# Altium PCB Time_skew.PcbDoc
Units mm, origin at the board's own origin, x right, y up, seen from the top; angles counter-clockwise.
Board outline 123.5 x 36 mm, 2 copper layers (Top Layer, Bottom Layer); 112 components, 61 nets, 346 pads, 107 vias.
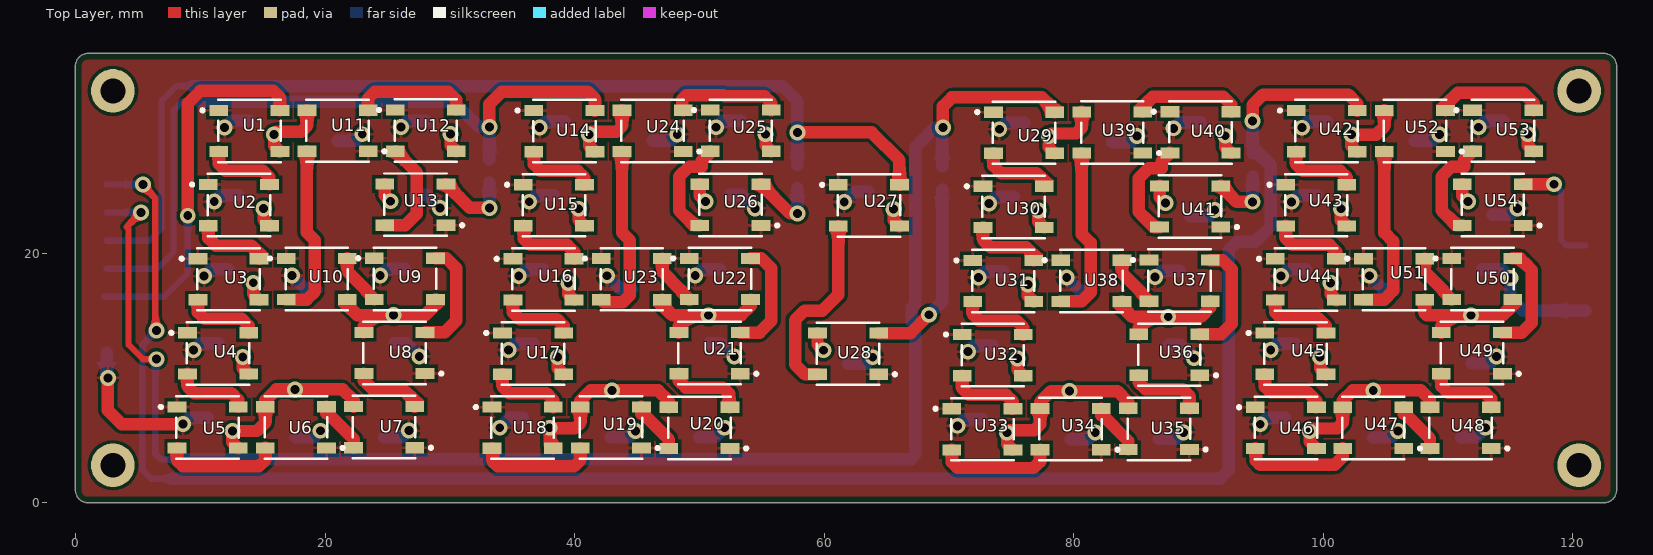
[diagram p0: Top Layer view]
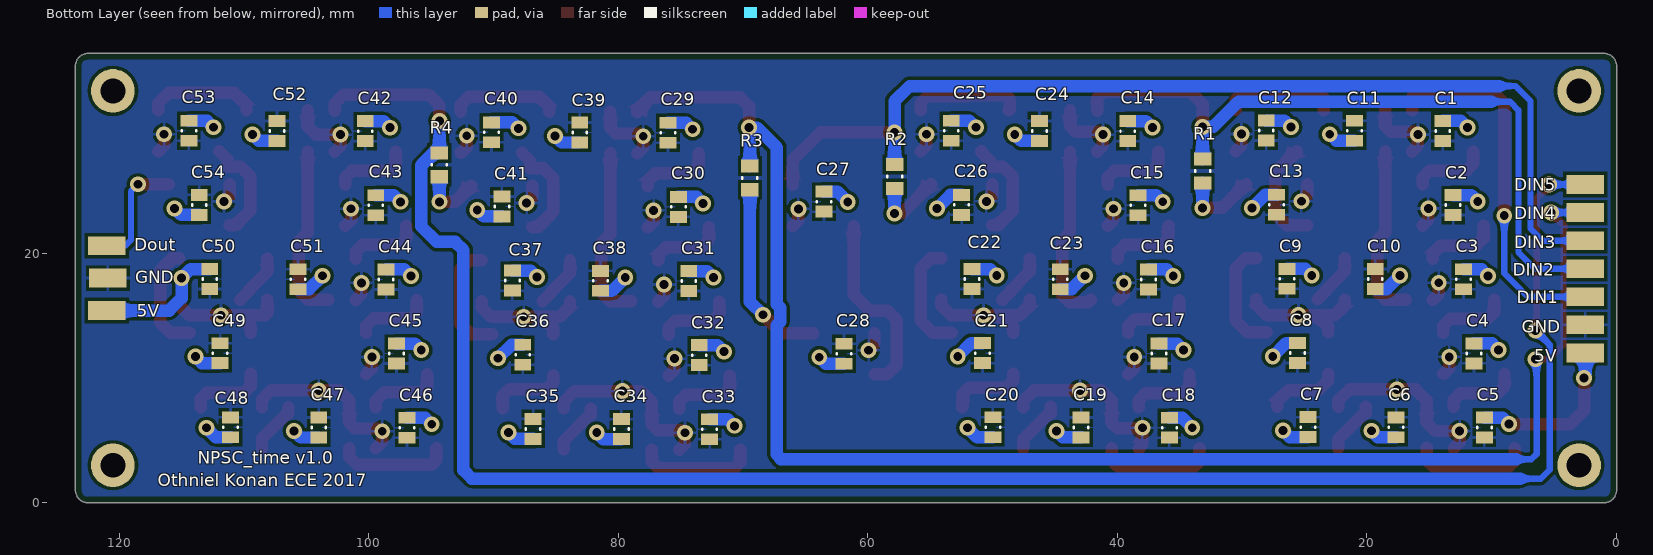
[diagram p1: Bottom Layer view, seen from below]
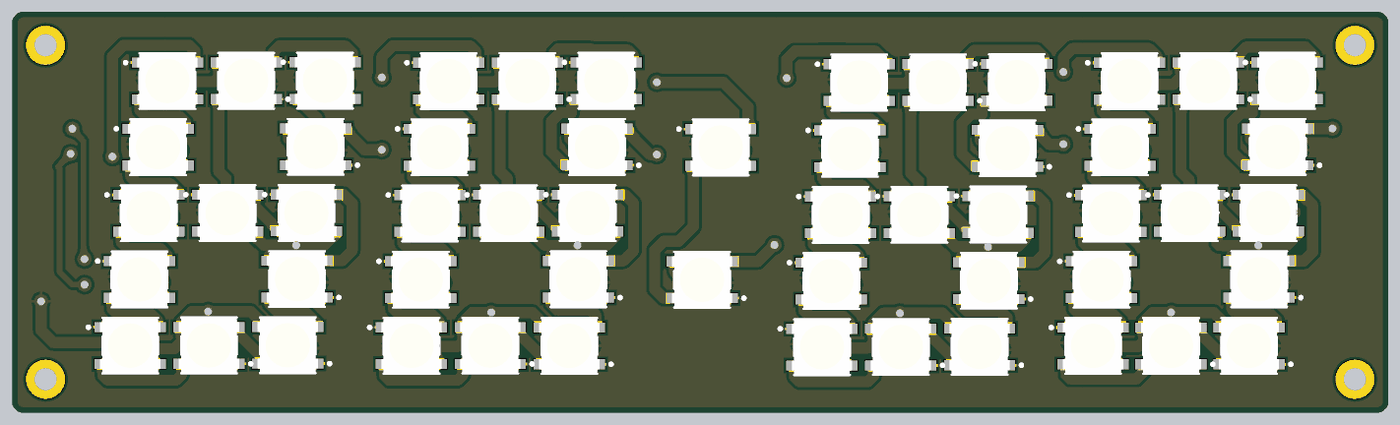
[diagram p2: 3D render of the assembled board from above, using the file's embedded part models]

## Layer stack, top to bottom
Top Solder: solder mask 0.0102, Solder Resist, Dk 3.5
Top Layer: signal copper 0.0356
Dielectric 1: dielectric 0.32, FR-4, Dk 4.8
Bottom Layer: signal copper 0.0356
Bottom Solder: solder mask 0.0102, Solder Resist, Dk 3.5

## Board outline
0,1 ccw(c1,1) 1,0 122.5,0 ccw(c122.5,1) 123.5,1 123.5,35 ccw(c122.5,35) 122.5,36 1,36 ccw(c1,35) 0,35

## Design rules (kind name [scope] priority, off if disabled: settings)
Clearance [All] p1: gap=0.254
PolygonConnect [All] p1: connectstyle=Relief reliefconductorwidth=0.254 reliefentries=4 polygonreliefangle="90 Angle" airgapwidth=0.254
RoomDefinition Time._skew [InComponentClass('Time._skew')] p1: confinementstyle=ConfineIn formatcopy=TRUE lockcomponents=FALSE outline -1,-4 129,-4 129,41 -1,41
RoutingVias [All] p1: holewidth=0.711 width=1.27 viastyle="Through Hole" minholewidth=0.711 minwidth=1.27 maxholewidth=0.711 maxwidth=1.27
SilkToSolderMaskClearance [IsPad] p1: minsilkscreentomaskgap=0.125 clearancetoexposedcopper=TRUE
SolderMaskExpansion [All] p1: expansion=0.102
Width [All] p1: maxlimit=2 minlimit=0.5 preferedwidth=1
29 further rules are at their usual default settings.

## Components (designator, comment, footprint, x,y, rotation, side; value= is the part's Value field where it differs from the comment)
C1 "CAP 0.5pF 10V 0805(2012)" CAPC0805(2012)100_L 13.933,29.789 r90 bottom
C2 "CAP 0.5pF 10V 0805(2012)" CAPC0805(2012)100_L 13.098,23.848 r90 bottom
C3 "CAP 0.5pF 10V 0805(2012)" CAPC0805(2012)100_L 12.263,17.906 r90 bottom
C4 "CAP 0.5pF 10V 0805(2012)" CAPC0805(2012)100_L 11.428,11.964 r90 bottom
C5 "CAP 0.5pF 10V 0805(2012)" CAPC0805(2012)100_L 10.593,6.023 r90 bottom
C6 "CAP 0.5pF 10V 0805(2012)" CAPC0805(2012)100_L 17.664,6.039 r270 bottom
C7 "CAP 0.5pF 10V 0805(2012)" CAPC0805(2012)100_L 24.735,6.055 r270 bottom
C8 "CAP 0.5pF 10V 0805(2012)" CAPC0805(2012)100_L 25.57,11.997 r90 bottom
C9 "CAP 0.5pF 10V 0805(2012)" CAPC0805(2012)100_L 26.405,17.938 r90 bottom
C10 "CAP 0.5pF 10V 0805(2012)" CAPC0805(2012)100_L 19.334,17.922 r270 bottom
C11 "CAP 0.5pF 10V 0805(2012)" CAPC0805(2012)100_L 21.004,29.805 r270 bottom
C12 "CAP 0.5pF 10V 0805(2012)" CAPC0805(2012)100_L 28.075,29.821 r90 bottom
C13 "CAP 0.5pF 10V 0805(2012)" CAPC0805(2012)100_L 27.24,23.88 r90 bottom
C14 "CAP 0.5pF 10V 0805(2012)" CAPC0805(2012)100_L 39.177,29.776 r90 bottom
C15 "CAP 0.5pF 10V 0805(2012)" CAPC0805(2012)100_L 38.342,23.834 r90 bottom
C16 "CAP 0.5pF 10V 0805(2012)" CAPC0805(2012)100_L 37.507,17.893 r90 bottom
C17 "CAP 0.5pF 10V 0805(2012)" CAPC0805(2012)100_L 36.672,11.951 r90 bottom
C18 "CAP 0.5pF 10V 0805(2012)" CAPC0805(2012)100_L 35.837,6.009 r90 bottom
C19 "CAP 0.5pF 10V 0805(2012)" CAPC0805(2012)100_L 42.908,6.026 r270 bottom
C20 "CAP 0.5pF 10V 0805(2012)" CAPC0805(2012)100_L 49.979,6.042 r270 bottom
C21 "CAP 0.5pF 10V 0805(2012)" CAPC0805(2012)100_L 50.814,11.983 r90 bottom
C22 "CAP 0.5pF 10V 0805(2012)" CAPC0805(2012)100_L 51.649,17.925 r90 bottom
C23 "CAP 0.5pF 10V 0805(2012)" CAPC0805(2012)100_L 44.578,17.909 r270 bottom
C24 "CAP 0.5pF 10V 0805(2012)" CAPC0805(2012)100_L 46.248,29.792 r270 bottom
C25 "CAP 0.5pF 10V 0805(2012)" CAPC0805(2012)100_L 53.319,29.808 r90 bottom
C26 "CAP 0.5pF 10V 0805(2012)" CAPC0805(2012)100_L 52.484,23.866 r90 bottom
C27 "CAP 0.5pF 10V 0805(2012)" CAPC0805(2012)100_L 63.516,24.126 r90 bottom
C28 "CAP 0.5pF 10V 0805(2012)" CAPC0805(2012)100_L 61.916,11.938 r270 bottom
C29 "CAP 0.5pF 10V 0805(2012)" CAPC0805(2012)100_L 76.018,29.647 r90 bottom
C30 "CAP 0.5pF 10V 0805(2012)" CAPC0805(2012)100_L 75.183,23.706 r90 bottom
C31 "CAP 0.5pF 10V 0805(2012)" CAPC0805(2012)100_L 74.348,17.764 r90 bottom
C32 "CAP 0.5pF 10V 0805(2012)" CAPC0805(2012)100_L 73.513,11.823 r90 bottom
C33 "CAP 0.5pF 10V 0805(2012)" CAPC0805(2012)100_L 72.678,5.881 r90 bottom
C34 "CAP 0.5pF 10V 0805(2012)" CAPC0805(2012)100_L 79.749,5.897 r270 bottom
C35 "CAP 0.5pF 10V 0805(2012)" CAPC0805(2012)100_L 86.82,5.913 r270 bottom
C36 "CAP 0.5pF 10V 0805(2012)" CAPC0805(2012)100_L 87.655,11.855 r90 bottom
C37 "CAP 0.5pF 10V 0805(2012)" CAPC0805(2012)100_L 88.49,17.796 r90 bottom
C38 "CAP 0.5pF 10V 0805(2012)" CAPC0805(2012)100_L 81.419,17.78 r270 bottom
C39 "CAP 0.5pF 10V 0805(2012)" CAPC0805(2012)100_L 83.089,29.663 r270 bottom
C40 "CAP 0.5pF 10V 0805(2012)" CAPC0805(2012)100_L 90.16,29.68 r90 bottom
C41 "CAP 0.5pF 10V 0805(2012)" CAPC0805(2012)100_L 89.325,23.738 r270 bottom
C42 "CAP 0.5pF 10V 0805(2012)" CAPC0805(2012)100_L 100.271,29.773 r90 bottom
C43 "CAP 0.5pF 10V 0805(2012)" CAPC0805(2012)100_L 99.436,23.832 r90 bottom
C44 "CAP 0.5pF 10V 0805(2012)" CAPC0805(2012)100_L 98.601,17.89 r90 bottom
C45 "CAP 0.5pF 10V 0805(2012)" CAPC0805(2012)100_L 97.766,11.948 r90 bottom
C46 "CAP 0.5pF 10V 0805(2012)" CAPC0805(2012)100_L 96.931,6.007 r90 bottom
C47 "CAP 0.5pF 10V 0805(2012)" CAPC0805(2012)100_L 104.002,6.023 r270 bottom
C48 "CAP 0.5pF 10V 0805(2012)" CAPC0805(2012)100_L 111.073,6.039 r270 bottom
C49 "CAP 0.5pF 10V 0805(2012)" CAPC0805(2012)100_L 111.908,11.981 r270 bottom
C50 "CAP 0.5pF 10V 0805(2012)" CAPC0805(2012)100_L 112.743,17.922 r90 bottom
C51 "CAP 0.5pF 10V 0805(2012)" CAPC0805(2012)100_L 105.672,17.906 r270 bottom
C52 "CAP 0.5pF 10V 0805(2012)" CAPC0805(2012)100_L 107.342,29.789 r270 bottom
C53 "CAP 0.5pF 10V 0805(2012)" CAPC0805(2012)100_L 114.413,29.805 r90 bottom
C54 "CAP 0.5pF 10V 0805(2012)" CAPC0805(2012)100_L 113.578,23.864 r270 bottom
R1 "Jumper 0805(2012)" RESC0805(2012)_N 33.174,26.58 r90 bottom
R2 "Jumper 0805(2012)" RESC0805(2012)_N 57.853,26.141 r90 bottom
R3 "Jumper 0805(2012)" RESC0805(2012)_N 69.45,26.026 r270 bottom
R4 "Jumper 0805(2012)" RESC0805(2012)_N 94.338,27.073 r270 bottom
U1 "WS2812B" ADAI-WS2812B_V 13.933,29.789 r0 top
U2 "WS2812B" ADAI-WS2812B_V 13.098,23.848 r0 top
U3 "WS2812B" ADAI-WS2812B_V 12.263,17.906 r0 top
U4 "WS2812B" ADAI-WS2812B_V 11.428,11.964 r0 top
U5 "WS2812B" ADAI-WS2812B_V 10.593,6.023 r0 top
U6 "WS2812B" ADAI-WS2812B_V 17.664,6.039 r180 top
U7 "WS2812B" ADAI-WS2812B_V 24.735,6.055 r180 top
U8 "WS2812B" ADAI-WS2812B_V 25.57,11.997 r180 top
U9 "WS2812B" ADAI-WS2812B_V 26.405,17.938 r0 top
U10 "WS2812B" ADAI-WS2812B_V 19.334,17.922 r0 top
U11 "WS2812B" ADAI-WS2812B_V 21.004,29.805 r180 top
U12 "WS2812B" ADAI-WS2812B_V 28.075,29.821 r0 top
U13 "WS2812B" ADAI-WS2812B_V 27.24,23.88 r180 top
U14 "WS2812B" ADAI-WS2812B_V 39.177,29.776 r0 top
U15 "WS2812B" ADAI-WS2812B_V 38.342,23.834 r0 top
U16 "WS2812B" ADAI-WS2812B_V 37.507,17.893 r0 top
U17 "WS2812B" ADAI-WS2812B_V 36.672,11.951 r0 top
U18 "WS2812B" ADAI-WS2812B_V 35.837,6.009 r0 top
U19 "WS2812B" ADAI-WS2812B_V 42.908,6.026 r180 top
U20 "WS2812B" ADAI-WS2812B_V 50,6 r180 top
U21 "WS2812B" ADAI-WS2812B_V 50.814,11.983 r180 top
U22 "WS2812B" ADAI-WS2812B_V 51.649,17.925 r0 top
U23 "WS2812B" ADAI-WS2812B_V 44.578,17.909 r0 top
U24 "WS2812B" ADAI-WS2812B_V 46.248,29.792 r180 top
U25 "WS2812B" ADAI-WS2812B_V 53.319,29.808 r0 top
U26 "WS2812B" ADAI-WS2812B_V 52.484,23.866 r180 top
U27 "WS2812B" ADAI-WS2812B_V 63.586,23.821 r0 top
U28 "WS2812B" ADAI-WS2812B_V 61.916,11.938 r180 top
U29 "WS2812B" ADAI-WS2812B_V 76.018,29.647 r0 top
U30 "WS2812B" ADAI-WS2812B_V 75.183,23.706 r0 top
U31 "WS2812B" ADAI-WS2812B_V 74.348,17.764 r0 top
U32 "WS2812B" ADAI-WS2812B_V 73.513,11.823 r0 top
U33 "WS2812B" ADAI-WS2812B_V 72.678,5.881 r0 top
U34 "WS2812B" ADAI-WS2812B_V 79.749,5.897 r180 top
U35 "WS2812B" ADAI-WS2812B_V 86.82,5.913 r180 top
U36 "WS2812B" ADAI-WS2812B_V 87.655,11.855 r180 top
U37 "WS2812B" ADAI-WS2812B_V 88.49,17.796 r0 top
U38 "WS2812B" ADAI-WS2812B_V 81.419,17.78 r0 top
U39 "WS2812B" ADAI-WS2812B_V 83.089,29.663 r180 top
U40 "WS2812B" ADAI-WS2812B_V 90.16,29.68 r0 top
U41 "WS2812B" ADAI-WS2812B_V 89.325,23.738 r180 top
U42 "WS2812B" ADAI-WS2812B_V 100.271,29.773 r0 top
U43 "WS2812B" ADAI-WS2812B_V 99.436,23.832 r0 top
U44 "WS2812B" ADAI-WS2812B_V 98.601,17.89 r0 top
U45 "WS2812B" ADAI-WS2812B_V 97.766,11.948 r0 top
U46 "WS2812B" ADAI-WS2812B_V 97,6 r0 top
U47 "WS2812B" ADAI-WS2812B_V 104,6 r180 top
U48 "WS2812B" ADAI-WS2812B_V 111,6 r180 top
U49 "WS2812B" ADAI-WS2812B_V 111.908,11.981 r180 top
U50 "WS2812B" ADAI-WS2812B_V 112.743,17.922 r0 top
U51 "WS2812B" ADAI-WS2812B_V 105.672,17.906 r0 top
U52 "WS2812B" ADAI-WS2812B_V 107.342,29.789 r180 top
U53 "WS2812B" ADAI-WS2812B_V 114.413,29.805 r0 top
U54 "WS2812B" ADAI-WS2812B_V 113.578,23.864 r180 top

## Footprints (in the part's own frame and the unit in brackets; to place one, negate y for a bottom-side part, rotate by r counter-clockwise, add the part's x,y. Pads: shape width x height; smd on the part's side, far side on the other; paste and mask are expansions set on the pad)
ADAI-WS2812B_V [mm] "SMD, 4-Leads, Body 5x5mm, Pitch 3.3mm"
  rect 1.5x0.9 smd: 1(-2.45,1.65) 2(-2.45,-1.65) 3(2.45,-1.65) 4(2.45,1.65)
  silkscreen extent -3.87,-2.5 2.5,2.5, body extent -2.7,-2.5 2.7,2.5, height 1.69
CAPC0805(2012)100_L [mm] "Chip Capacitor, Body 2.0x1.2mm, Height 1.0mm, IPC High Density"
  rect 0.95x1.35 smd: 1(-0.8,0) 2(0.8,0)
  silkscreen extent -0.05,-0.58 0.05,0.58, body extent -1.1,-0.72 1.1,0.72, height 1
RESC0805(2012)_N [mm] "Chip Resistor, Body 2.0x1.3mm, IPC Medium Density"
  rect 1.05x1.4 smd: 1(-0.95,0) 2(0.95,0)
  silkscreen extent -0.05,-0.6 0.05,0.6, body extent -1.1,-0.67 1.1,0.68, height 0.7

## Part data
C1 C2 C3 C4 C5 C6 C7 C8 C9 C10 C11 C12 C13 C14 C15 C16 C17 C18 C19 C20 C21 C22 C23 C24 C25 C26 C27 C28 C29 C30 C31 C32 C33 C34 C35 C36 C37 C38 C39 C40 C41 C42 C43 C44 C45 C46 C47 C48 C49 C50 C51 C52 C53 C54: library part CMP-1036-00005-1, "CAP 0.5pF 10V ±0.5pF 0805 (2012 Metric) Thickness 1mm SMD"
R1 R2 R3 R4: library part CMP-1013-00001-1, "Jumper 0805 (2012 Metric)"
U1 U2 U3 U4 U5 U6 U7 U8 U9 U10 U11 U12 U13 U14 U15 U16 U17 U18 U19 U20 U21 U22 U23 U24 U25 U26 U27 U28 U29 U30 U31 U32 U33 U34 U35 U36 U37 U38 U39 U40 U41 U42 U43 U44 U45 U46 U47 U48 U49 U50 U51 U52 U53 U54: library part CMP-1740-00005-1, "Intelligent Control LED Integrated Light Source, 3.5 to 5.3 V, -25 to 80 degC, 4-Pin SMD, RoHS, Bulk"

## Free pads (board coordinates)
  rect 3x1.5 smd far side: 1(2.5,12) 1(120.9,18) 1(121,15.4) 2(2.5,14.25) 3(2.5,16.5) 3(121,20.6) 4(2.5,18.75) 5(2.5,21) 6(2.5,23.25) 7(2.5,25.5)
  round 3.5 hole 2: 2(3,3) 3(3,33) 4(120.5,3) 5(120.5,33)

## Via types
v1: diameter 1.27, hole 0.711, Top Layer to Bottom Layer, tented both sides, 107 vias

## Nets (pads, with @x,y where several pads share a name; then routed paths per layer and width w, separated by ;. In a path a pad name is that pad's centre, name@x,y a point inside that pad or via, vN(x,y) a via of type N, cw(c..) or ccw(c..) an arc to the next point about the centre after c; other vN are vias at no path point)
5V: C1.2 C2.2 C3.2 C4.2 C5.2 C6.2 C7.2 C8.2 C9.2 C10.2 C11.2 C12.2 C13.2 C14.2 C15.2 C16.2 C17.2 C18.2 C19.2 C20.2 C21.2 C22.2 C23.2 C24.2 C25.2 C26.2 C27.2 C28.2 C29.2 C30.2 C31.2 C32.2 C33.2 C34.2 C35.2 C36.2 C37.2 C38.2 C39.2 C40.2 C41.2 C42.2 C43.2 C44.2 C45.2 C46.2 C47.2 C48.2 C49.2 C50.2 C51.2 C52.2 C53.2 C54.2 pad.1@2.5,12 pad.1@121,15.4 U1.1 U2.1 U3.1 U4.1 U5.1 U6.1 U7.1 U8.1 U9.1 U10.1 U11.1 U12.1 U13.1 U14.1 U15.1 U16.1 U17.1 U18.1 U19.1 U20.1 U21.1 U22.1 U23.1 U24.1 U25.1 U26.1 U27.1 U28.1 U29.1 U30.1 U31.1 U32.1 U33.1 U34.1 U35.1 U36.1 U37.1 U38.1 U39.1 U40.1 U41.1 U42.1 U43.1 U44.1 U45.1 U46.1 U47.1 U48.1 U49.1 U50.1 U51.1 U52.1 U53.1 U54.1 | length 140.6
  Top Layer w1: v1(2.6,10) 2.6,7.4 3.699,6.301 v1(8.613,6.301)
  Bottom Layer w1: pad.1@2.5,12 2.5,10.1 v1(2.6,10) ; v1(8.613,6.301) 9.134,6.823 C5.2 ; v1(9.448,12.243) 9.969,12.764 C4.2 ; v1(10.314,18.153) 10.314,18.216 10.804,18.706 C3.2 ; v1(11.118,24.126) 11.639,24.648 C2.2 ; v1(11.953,30.068) 12.474,30.589 C1.2 ; v1(17.354,18.2) 18.432,17.122 C10.2 ; C6.2 19.123,5.239 v1(19.645,5.761) ; C11.2 22.463,29.005 v1(22.985,29.527) ; v1(24.425,18.217) 24.946,18.738 C9.2 ; C7.2 26.194,5.255 v1(26.716,5.777) ; C8.2 26.473,12.797 v1(27.551,11.718) ; v1(26.095,30.1) 26.617,30.621 C12.2 ; C13.2 28.143,24.68 v1(29.221,23.601) ; v1(34,6) 34.809,6.809 C18.2 ; v1(34.692,12.229) 35.213,12.751 C17.2 ; v1(35.527,18.171) 36.048,18.693 C16.2 ; v1(36.362,24.113) 36.883,24.634 C15.2 ; v1(37.197,30.054) 37.718,30.576 C14.2 ; v1(42.598,18.187) 43.676,17.109 C23.2 ; C19.2 44.367,5.226 v1(44.889,5.747) ; C24.2 47.707,28.992 v1(48.229,29.514) ; v1(49.669,18.203) 50.19,18.725 C22.2 ; C20.2 51.242,5.242 v1(52,6) ; C21.2 51.716,12.783 v1(52.795,11.705) ; v1(51.339,30.086) 51.86,30.608 C25.2 ; C26.2 53.386,24.666 v1(54.465,23.588) ; v1(61.605,24.099) 62.432,24.926 C27.2 ; C28.2 63.375,11.138 v1(63.896,11.659) ; v1(70.697,6.159) 71.219,6.681 C33.2 ; v1(71.532,12.101) 72.054,12.623 C32.2 ; v1(72.367,18.043) 72.889,18.564 C31.2 ; v1(73.202,23.984) 73.724,24.506 C30.2 ; v1(74.037,29.926) 74.559,30.447 C29.2 ; v1(79.438,18.059) 80.517,16.98 C38.2 ; C34.2 81.208,5.097 v1(81.729,5.619) ; C39.2 84.548,28.863 v1(85.069,29.385) ; v1(86.509,18.075) 87.031,18.596 C37.2 ; C35.2 88.279,5.113 v1(88.8,5.635) ; C36.2 88.557,12.655 v1(89.635,11.576) ; v1(88,30) 88.48,30.48 C40.2 ; C41.2 90.784,22.938 v1(91.305,23.46) ; v1(94.951,6.285) 95.472,6.807 C46.2 ; v1(95.786,12.227) 96.307,12.748 C45.2 ; v1(96.621,18.168) 97.142,18.69 C44.2 ; v1(97.456,24.11) 97.977,24.632 C43.2 ; v1(98.291,30.052) 98.812,30.573 C42.2 ; v1(103.692,18.184) 104.77,17.106 C51.2 ; C47.2 105.461,5.223 v1(105.983,5.744) ; C52.2 108.801,28.989 v1(109.323,29.511) ; C48.2 112.239,5.239 v1(113,6) ; C49.2 113.367,11.181 v1(113.889,11.702) ; v1(112.433,30.084) 112.955,30.605 C53.2 ; C50.2 114.278,18.722 v1(115,18) 115,16.4 116,15.4 pad.1@121,15.4 ; C54.2 115.037,23.064 v1(115.559,23.585)
Din1: pad.3@2.5,16.5 U1.4 | length 30.1
  Top Layer w1: v1(9,23) 9,32 10,33 15.859,33 16.383,32.476 U1.4
  Bottom Layer w0.5: pad.3@2.3,16.5 7.1,16.5 9,18.4 v1(9,23)
Din2: pad.4@2.5,18.75 R1.2 U14.4 | length 58.2
  Top Layer w1: v1(33.174,30.108) 33.174,31.941 34.18,32.947 41.064,32.947 41.627,32.384 U14.4
  Bottom Layer w0.5: pad.4@2.5,18.75 6.55,18.75 7.861,20.061 7.861,31.461 8.534,32.134 10.034,32.134
  Bottom Layer w1: 10.034,32.134 30.289,32.134 30.404,32.019 30.412,32.019 32.323,30.108 v1(33.174,30.108) R1.2
Din3: pad.5@2.5,21 R2.2 U27.4 | length 83.1
  Top Layer w1: v1(57.853,29.669) 63.811,29.669 66.036,27.444 U27.4
  Bottom Layer w0.5: pad.5@2.5,21 5.9,21 6.9,22 6.9,32.2 8.088,33.388 9.388,33.388
  Bottom Layer w1: 9.388,33.388 56.642,33.388 57.853,32.177 v1(57.853,29.669) R2.2
Din4: pad.6 R3.1 U29.4 | length 127.7
  Top Layer w0.5: v1(5.25,23.25) 4.1,22.1 4.261,21.939 4.261,12.661 5.422,11.5 v1(6.5,11.5)
  Top Layer w1: v1(69.511,30.057) 69.511,31.759 70.231,32.479 72.483,32.479 72.505,32.501 74.63,32.501 74.652,32.479 77.426,32.479 78.468,31.437 U29.4
  Bottom Layer w0.5: pad.6 v1(5.25,23.25) ; v1@6.4,11.4 6.4,3.9 6.828,3.472 8.053,3.472
  Bottom Layer w1: 8.053,3.472 66.971,3.472 67.29,3.883 67.29,14.224 67.025,14.488 67.025,15.639 67.29,15.904 67.29,28.457 68.89,30.057 v1(69.511,30.057) 69.45,29.995 R3.1
Din5: pad.7 R4.1 U42.4 | length 156.3
  Top Layer w0.5: v1(5.4,25.5) 5.4,25.4 6.4,24.4 6.4,13.896 v1(6.496,13.8)
  Top Layer w1: v1(94.338,30.6) 94.338,31.869 95.173,32.704 102.006,32.704 102.721,31.988 U42.4
  Bottom Layer w0.5: pad.7 v1(5.4,25.5) ; v1(6.496,13.8) 5.4,12.704 5.361,12.665 5.361,2.639 6.083,1.917 7.717,1.917
  Bottom Layer w1: 7.717,1.917 91.728,1.917 92.413,2.602 92.413,20.24 93.077,20.904 94.544,20.904 95.792,22.152 95.792,27.035 94.804,28.023 R4.1 v1(94.338,30.6)
Dout: pad.3@121,20.6 U54.2 | length 9.3
  Top Layer w1: U54.2 v1(118.486,25.514)
  Bottom Layer w0.5: v1(118.486,25.514) 119.058,24.942 119.058,21.042 119.5,20.6 pad.3@121,20.6
GND: C1.1 C2.1 C3.1 C4.1 C5.1 C6.1 C7.1 C8.1 C9.1 C10.1 C11.1 C12.1 C13.1 C14.1 C15.1 C16.1 C17.1 C18.1 C19.1 C20.1 C21.1 C22.1 C23.1 C24.1 C25.1 C26.1 C27.1 C28.1 C29.1 C30.1 C31.1 C32.1 C33.1 C34.1 C35.1 C36.1 C37.1 C38.1 C39.1 C40.1 C41.1 C42.1 C43.1 C44.1 C45.1 C46.1 C47.1 C48.1 C49.1 C50.1 C51.1 C52.1 C53.1 C54.1 pad.1@120.9,18 pad.2@2.5,14.25 U1.3 U2.3 U3.3 U4.3 U5.3 U6.3 U7.3 U8.3 U9.3 U10.3 U11.3 U12.3 U13.3 U14.3 U15.3 U16.3 U17.3 U18.3 U19.3 U20.3 U21.3 U22.3 U23.3 U24.3 U25.3 U26.3 U27.3 U28.3 U29.3 U30.3 U31.3 U32.3 U33.3 U34.3 U35.3 U36.3 U37.3 U38.3 U39.3 U40.3 U41.3 U42.3 U43.3 U44.3 U45.3 U46.3 U47.3 U48.3 U49.3 U50.3 U51.3 U52.3 U53.3 U54.3 | length 157.6
  Top Layer w1: U5.3 12.574,4.842 v1(12.574,5.745) 14.546,5.745 15.214,6.413 U6.3 15.214,8.195 16.099,9.079 v1(17.587,9.079) 21.417,9.079 22.285,8.211 U7.3 ; v1(13.409,11.686) 13.409,10.784 U4.3 ; v1(14.244,17.628) 14.244,16.726 U3.3 ; v1(15.079,23.569) 15.079,22.667 U2.3 ; U1.3 15.914,28.609 v1(15.914,29.511) 16.131,29.728 18.103,29.728 18.554,30.179 U11.3 ; U10.3 21.784,15.846 22.594,15.037 24.005,15.037 ; U8.3 23.12,14.152 24.005,15.037 ; U13.3 24.79,24.628 v1(25.26,24.158) ; U9.3 28.855,15.862 28.03,15.037 v1(25.493,15.037) 24.005,15.037 ; v1(30.056,29.543) 30.056,28.641 U12.3 ; U18.3 38,4.646 v1(38,6) 38.052,5.948 40.007,5.948 40.458,6.399 U19.3 40.458,8.181 41.277,9 v1(43,9) 46.688,9 47.55,8.138 U20.3 ; v1(38.653,11.673) 38.653,10.771 U17.3 ; v1(39.488,17.614) 39.488,16.712 U16.3 ; v1(40.323,23.556) 40.323,22.654 U15.3 ; U14.3 41.158,28.595 v1(41.158,29.498) 41.374,29.714 43.347,29.714 43.798,30.166 U24.3 ; U23.3 47.028,15.833 47.837,15.024 49.249,15.024 ; U21.3 48.364,14.139 49.249,15.024 ; U26.3 50.034,24.614 v1(50.504,24.145) ; U22.3 54.099,15.769 53.354,15.024 v1(50.737,15.024) 49.249,15.024 ; v1(55.3,29.53) 55.3,28.627 U25.3 ; U28.3 59.466,12.686 v1(59.935,12.216) ; v1(65.566,23.543) 65.566,22.64 U27.3 ; U33.3 74.658,4.7 v1(74.658,5.603) 74.875,5.819 76.847,5.819 77.299,6.271 U34.3 77.299,8.053 78.183,8.937 v1(79.671,8.937) 83.501,8.937 84.37,8.069 U35.3 ; v1(75.493,11.544) 75.493,10.642 U32.3 ; v1(76.328,17.486) 76.328,16.584 U31.3 ; v1(77.163,23.427) 77.163,22.525 U30.3 ; U29.3 77.998,28.467 v1(77.998,29.369) 78.215,29.586 80.188,29.586 80.639,30.037 U39.3 ; U38.3 83.869,15.704 84.678,14.895 86.09,14.895 ; U36.3 85.205,14.01 86.09,14.895 ; U41.3 86.875,24.486 v1(87.344,24.016) ; U37.3 90.94,15.641 90.194,14.895 v1(87.577,14.895) 86.09,14.895 ; v1(92.14,29.401) 92.14,28.499 U40.3 ; U46.3 98.912,4.888 v1(98.912,5.728) 99.129,5.945 101.101,5.945 101.55,6.394 U47.3 101.55,8.181 102.369,9 v1(104,9) 107.818,9 108.55,8.268 U48.3 ; v1(99.747,11.67) 99.747,10.768 U45.3 ; v1(100.582,17.612) 100.582,16.709 U44.3 ; v1(101.417,23.553) 101.417,22.651 U43.3 ; U42.3 102.252,28.593 v1(102.252,29.495) 104.224,29.495 104.892,30.163 U52.3 ; U51.3 108.122,15.186 108.287,15.021 110.343,15.021 ; U49.3 109.458,14.136 110.343,15.021 ; U54.3 111.128,24.612 v1(111.598,24.142) ; U50.3 115.193,15.846 114.368,15.021 v1(111.831,15.021) 110.343,15.021 ; v1(116.394,29.527) 116.394,28.625 U53.3
NetR1_1: R1.1 U13.2 | length 6.3
  Top Layer w1: U13.2 31.603,23.618 v1(33.174,23.618)
  Bottom Layer w1: v1(33.174,23.618) R1.1
NetR2_1: R2.1 U26.2 | length 5.9
  Top Layer w1: U26.2@54.951,25.516 U26.2 57.272,23.179 v1(57.853,23.179)
  Bottom Layer w1: v1(57.853,23.179) R2.1
NetR3_2: R3.2 U28.2 | length 15.1
  Top Layer w1: U28.2 66.938,13.588 v1(68.414,15.064)
  Bottom Layer w1: v1(68.414,15.064) 69.45,16.1 R3.2
NetR4_2: R4.2 U41.2 | length 5.1
  Top Layer w1: U41.2 93.053,24.11 v1(94.338,24.11)
  Bottom Layer w1: v1(94.338,24.11) R4.2
NetU1_2: U1.2 U2.4 | length 6.1
  Top Layer w1: U1.2 11.483,27.149 12.022,26.61 15.001,26.61 15.548,26.063 U2.4
NetU2_2: U2.2 U3.4 | length 6
  Top Layer w1: U2.2 10.648,21.207 11.257,20.599 14.097,20.599 14.713,19.982 U3.4
NetU3_2: U3.2 U4.4 | length 6.1
  Top Layer w1: U3.2 9.813,15.266 10.352,14.727 13.331,14.727 13.878,14.179 U4.4
NetU4_2: U4.2 U5.4 | length 6.1
  Top Layer w1: U4.2 8.978,9.324 9.517,8.785 12.496,8.785 13.043,8.238 U5.4
NetU5_2: U5.2 U6.4 | length 9.4
  Top Layer w1: U5.2 8.143,3.382 8.605,2.921 14.701,2.921 15.214,3.434 U6.4
NetU6_2: U6.2 U7.4 | length 4.2
  Top Layer w1: U6.2 20.114,7.15 20.22,7.15 22.285,5.084 U7.4
NetU7_2: U7.2 U8.4 | length 5.7
  Top Layer w1: U8.4 23.12,9.782 23.876,9.026 26.29,9.026 27.185,8.131 U7.2
NetU8_2: U8.2 U9.4 | length 9.1
  Top Layer w1: U8.2 29.584,13.647 30.514,14.577 30.514,18.805 29.731,19.588 U9.4
NetU9_2: U9.2 U10.4 | length 4.2
  Top Layer w1: U10.4 21.784,18.538 23.288,17.034 23.288,16.955 23.953,16.291 U9.2@23.955,16.291
NetU10_2: U10.2 U11.4 | length 14.1
  Top Layer w1: U10.2 18.535,16.272 19.195,16.932 19.195,21.024 18.554,21.665 U11.4
NetU11_2: U11.2 U12.4 | length 9.3
  Top Layer w1: U11.2 23.454,32.411 23.967,32.923 29.893,32.923 30.525,32.291 U12.4
NetU12_2: U12.2 U13.4 | length 8.7
  Top Layer w1: U13.4 26.414,22.23 27.355,23.171 27.355,26.442 U12.2
NetU14_2: U14.2 U15.4 | length 6.1
  Top Layer w1: U14.2 36.727,27.135 37.266,26.596 40.245,26.596 40.792,26.049 U15.4
NetU15_2: U15.2 U16.4 | length 6.1
  Top Layer w1: U15.2 35.944,22.132 35.944,21.142 36.431,20.655 39.41,20.655 39.957,20.108 U16.4
NetU16_2: U16.2 U17.4 | length 6.1
  Top Layer w1: U16.2 35.057,15.252 35.596,14.713 38.575,14.713 39.122,14.166 U17.4
NetU17_2: U17.2 U18.4 | length 6.1
  Top Layer w1: U17.2 34.222,9.311 34.761,8.772 37.74,8.772 38.287,8.224 U18.4
NetU18_2: U18.2 U19.4 | length 9.4
  Top Layer w1: U18.2 33.439,4.308 33.439,3.317 33.848,2.908 39.945,2.908 40.458,3.42 U19.4
NetU19_2: U19.2 U20.4 | length 4.3
  Top Layer w1: U19.2 45.358,7.136 45.464,7.136 47.55,5.05 U20.4
NetU20_2: U20.2 U21.4 | length 6.1
  Top Layer w1: U21.4 48.364,9.768 48.911,9.221 51.89,9.221 52.377,8.734 52.377,7.723 U20.2
NetU21_2: U21.2 U22.4 | length 9.1
  Top Layer w1: U21.2 54.827,13.633 55.757,14.563 55.757,18.792 54.975,19.575 U22.4
NetU22_2: U22.2 U23.4 | length 4.2
  Top Layer w1: U23.4 47.028,18.525 48.532,17.021 48.532,16.942 49.196,16.278 U22.2@49.249,16.278
NetU23_2: U23.2 U24.4 | length 14.4
  Top Layer w1: U23.2 42.319,16.067 43.874,16.067 44.439,16.632 44.439,21.011 43.798,21.651 U24.4
NetU24_2: U24.2 U25.4 | length 9
  Top Layer w1: U24.2 48.646,31.494 48.646,32.345 48.963,32.662 51.932,32.662 52.024,32.57 55.222,32.57 55.769,32.023 U25.4
NetU25_2: U25.2 U26.4 | length 8.5
  Top Layer w1: U26.4 49.6,22.216 48.384,23.433 48.384,26.132 49.189,26.938 50.202,26.938 50.202,27.387 50.921,28.106 U25.2
NetU27_2: U27.2 U28.4 | length 15.5
  Top Layer w1: U28.4 58.467,10.288 57.668,11.087 57.668,14.622 58.442,15.396 59.85,15.396 61.136,16.682 U27.2
NetU29_2: U29.2 U30.4 | length 6
  Top Layer w1: U29.2 73.568,27.007 74.176,26.398 77.016,26.398 77.633,25.782 U30.4
NetU30_2: U30.2 U31.4 | length 6.1
  Top Layer w1: U30.2 72.733,21.065 73.341,20.457 76.181,20.457 76.798,19.84 U31.4 U31.4@76.746,19.466
NetU31_2: U31.2 U32.4 | length 6.1
  Top Layer w1: U31.2 71.898,15.124 72.437,14.585 75.416,14.585 75.963,14.038 U32.4
NetU32_2: U32.2 U33.4 | length 6.1
  Top Layer w1: U32.2 71.063,9.182 71.602,8.643 74.581,8.643 75.128,8.096 U33.4
NetU33_2: U33.2 U34.4 | length 9.4
  Top Layer w1: U33.2 70.228,3.24 70.689,2.779 76.786,2.779 77.299,3.292 U34.4
NetU34_2: U34.2 U35.4 | length 4.2
  Top Layer w1: U34.2 82.199,7.008 82.305,7.008 84.37,4.943 U35.4
NetU35_2: U35.2 U36.4 | length 6.1
  Top Layer w1: U36.4 85.205,9.64 85.752,9.093 88.731,9.093 89.27,8.554 U35.2
NetU36_2: U36.2 U37.4 | length 9.3
  Top Layer w1: U36.2 91.834,13.505 92.66,14.33 92.66,18.725 91.938,19.446 U37.4
NetU37_2: U37.2 U38.4 | length 4.2
  Top Layer w1: U38.4 83.869,18.397 85.373,16.893 85.373,16.813 86.037,16.149 U37.2@86.04,16.149
NetU38_2: U38.2 U39.4 | length 14.1
  Top Layer w1: U38.2 78.994,16.156 80.645,16.156 81.349,16.86 81.349,20.813 80.639,21.523 U39.4
NetU39_2: U39.2 U40.4 | length 8.7
  Top Layer w1: U39.2 85.539,31.739 86.333,32.534 91.971,32.534 92.61,31.895 U40.4
NetU40_2: U40.2 U41.4 | length 8.5
  Top Layer w1: U41.4 86.441,22.088 85.225,23.304 85.225,26.004 86.03,26.809 87.043,26.809 87.043,27.363 U40.2
NetU42_2: U42.2 U43.4 | length 6.1
  Top Layer w1: U42.2 97.821,27.133 98.36,26.594 101.339,26.594 101.886,26.047 U43.4
NetU43_2: U43.2 U44.4 | length 6.1
  Top Layer w1: U43.2 96.986,21.191 97.525,20.652 100.504,20.652 101.051,20.105 U44.4
NetU44_2: U44.2 U45.4 | length 6.1
  Top Layer w1: U44.2 96.151,15.249 96.629,14.772 99.608,14.772 100.216,14.163 U45.4
NetU45_2: U45.2 U46.4 | length 6.1
  Top Layer w1: U45.2 95.316,9.308 95.786,8.838 98.765,8.838 99.45,8.153 U46.4
NetU46_2: U46.2 U47.4 | length 9
  Top Layer w1: U46.2 94.595,4.305 94.595,3.377 94.936,3.036 100.908,3.036 101.55,3.678 U47.4
NetU47_2: U47.2 U48.4 | length 4.2
  Top Layer w1: U47.2 106.45,7.133 106.558,7.133 108.55,5.142 U48.4
NetU48_2: U48.2 U49.4 | length 6.1
  Top Layer w1: U49.4 109.458,9.34 109.997,8.801 112.976,8.801 113.45,8.327 U48.2
NetU49_2: U49.2 U50.4 | length 8.8
  Top Layer w1: U49.2 115.922,13.631 116.697,14.406 116.697,18.641 115.766,19.572 U50.4
NetU50_2: U50.2 U51.4 | length 4.2
  Top Layer w1: U51.4 108.122,18.522 109.626,17.018 109.626,16.939 110.291,16.275 U50.2@110.293,16.275
NetU51_2: U51.2 U52.4 | length 14.1
  Top Layer w1: U51.2 103.248,16.281 104.899,16.281 105.603,16.985 105.603,20.938 104.892,21.649 U52.4
NetU52_2: U52.2 U53.4 | length 8.8
  Top Layer w1: U52.2 109.792,31.865 110.765,32.838 116.04,32.838 116.863,32.015 U53.4
NetU53_2: U53.2 U54.4 | length 8.5
  Top Layer w1: U54.4 110.695,22.214 109.478,23.43 109.478,26.13 110.284,26.935 111.296,26.935 111.296,27.488 U53.2

## Polygon pours and split planes (outlines as drawn)
5V on Top Layer "Top Layer-No Net" (solid, remove dead copper, pour order 12): 0.5,1 ccw(c1,1) 1,0.5 122.5,0.5 ccw(c122.5,1) 123,1 123,35 ccw(c122.5,35) 122.5,35.5 1,35.5 ccw(c1,35) 0.5,35
GND on Bottom Layer "Top Layer-No Net1" (solid, remove dead copper, pour order 14): 0.5,1 ccw(c1,1) 1,0.5 122.5,0.5 ccw(c122.5,1) 123,1 123,35 ccw(c122.5,35) 122.5,35.5 1,35.5 ccw(c1,35) 0.5,35

## Silkscreen, mask and mechanical layers (free items; w line width, h text height)
Bottom Overlay:
  text "DIN5" at 8.2,25 h1
  text "DIN4" at 8.2,22.7 h1
  text "DIN3" at 8.2,20.4 h1
  text "Dout" at 118.8,20.2 h1
  text "DIN2" at 8.3,18.2 h1
  text "GND" at 118.7,17.6 h1
  text "DIN1" at 8,16 h1
  text "5V" at 118.6,14.9 h1
  text "GND" at 7.6,13.6 h1
  text "5V" at 6.6,11.3 h1
  text "NPSC_time v1.0" at 113.7,3.1 h1
  text "Othniel Konan ECE 2017" at 116.9,1.3 h1
Mechanical 1:
  the board outline again, w0.254